# Altium PCB VCO PCB.PcbDoc
Units mm, origin at the board's own origin, x right, y up, seen from the top; angles counter-clockwise.
Board outline 129.54 x 57.15 mm, 2 copper layers (Top Layer, Bottom Layer); 75 components, 45 nets, 208 pads, 43 vias.
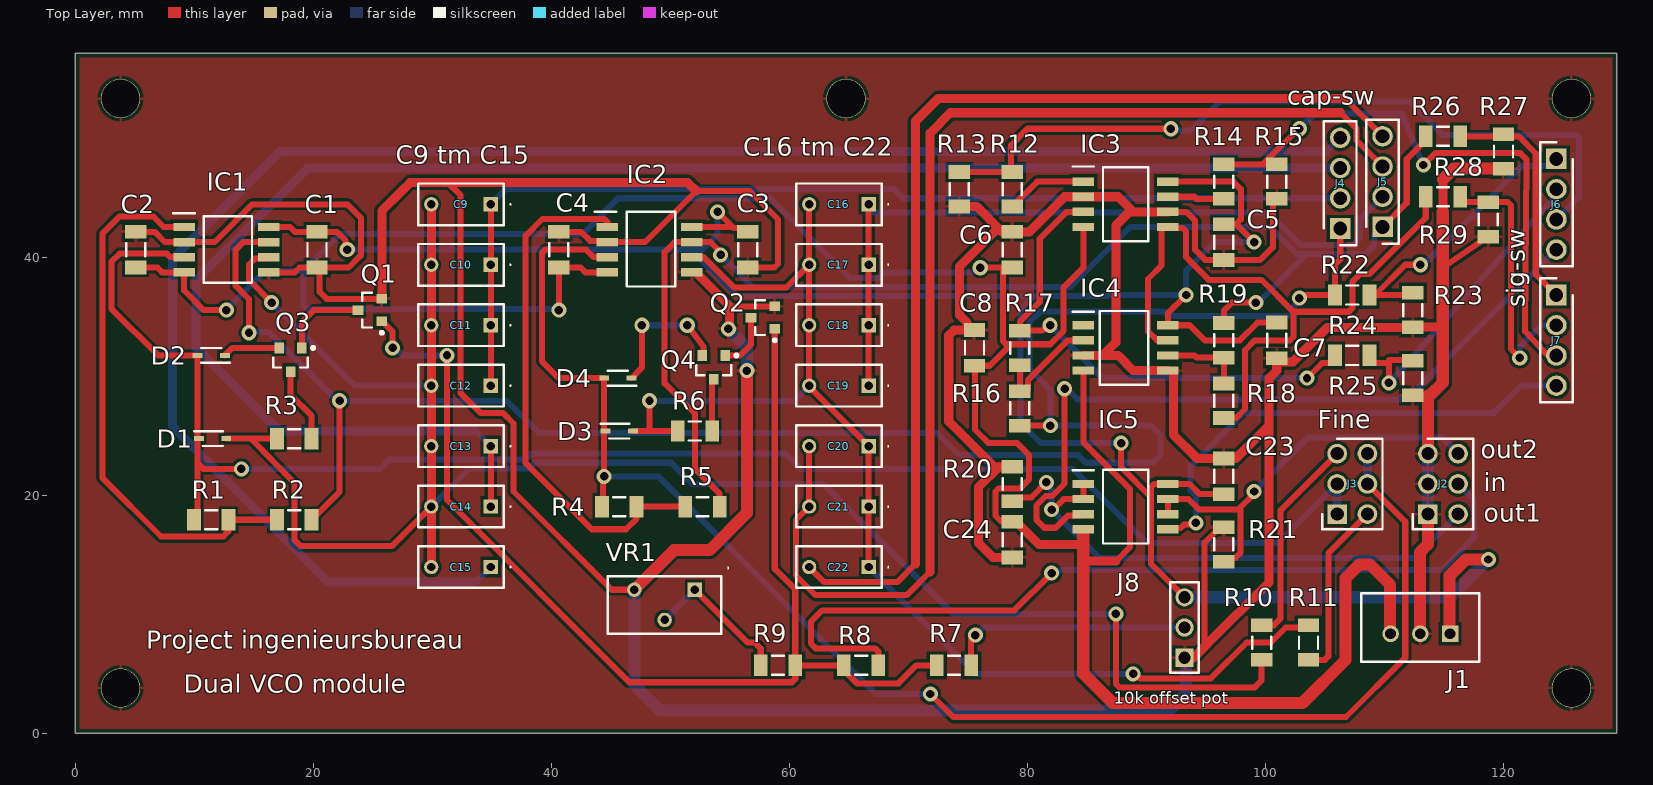
[diagram p0: Top Layer view]
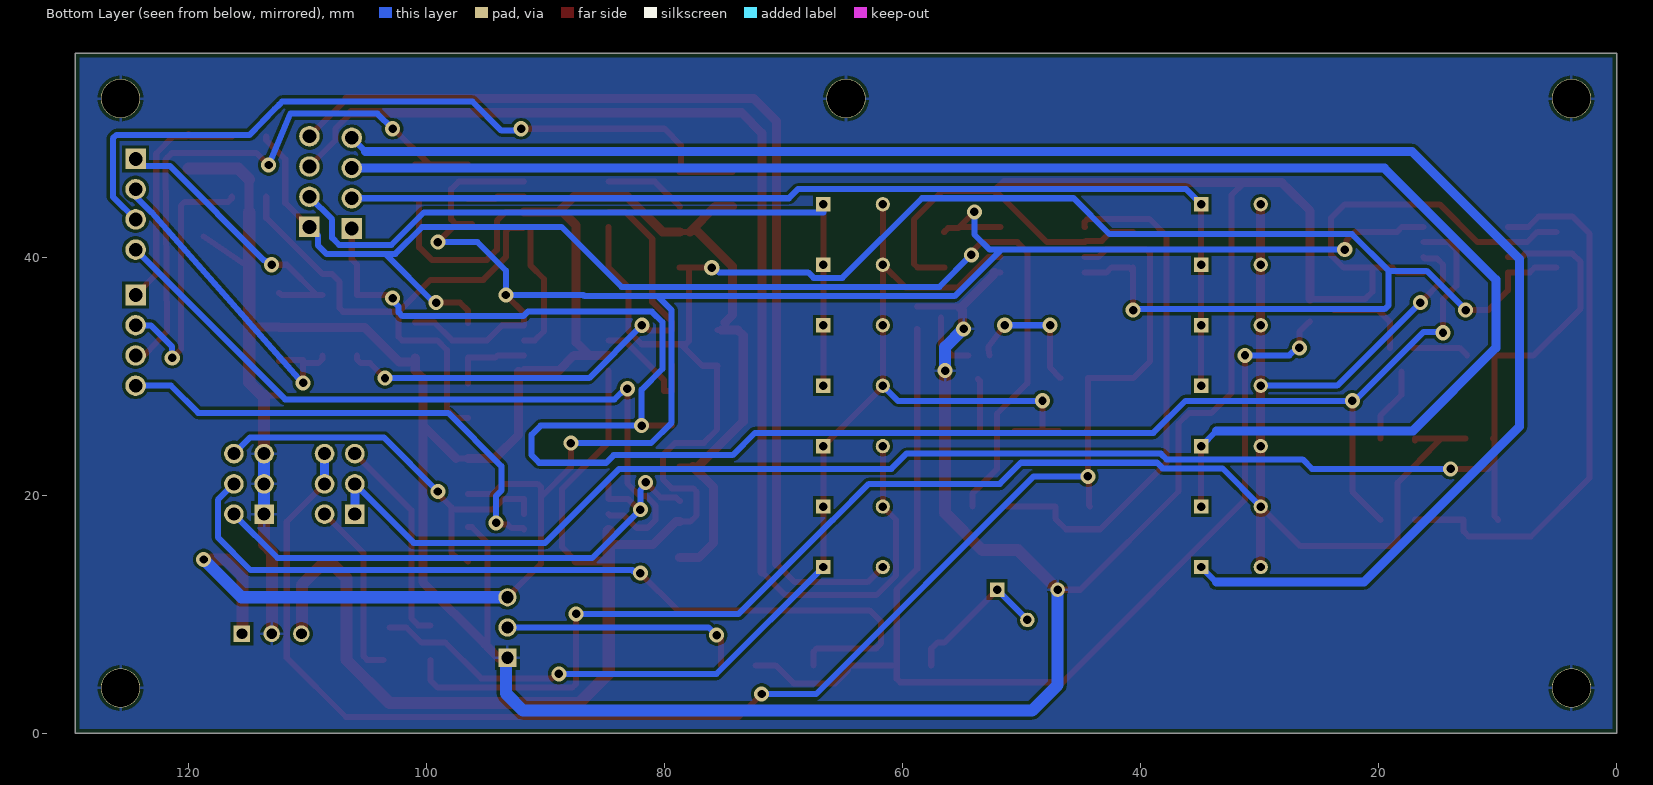
[diagram p1: Bottom Layer view, seen from below]

## Layer stack, top to bottom
Top Solder: solder mask 0.0102, Solder Resist, Dk 3.5
Top Layer: signal copper 0.0356
Dielectric 1: dielectric 0.32, FR-4, Dk 4.8
Bottom Layer: signal copper 0.0356
Bottom Solder: solder mask 0.0102, Solder Resist, Dk 3.5

## Board outline
0,0 129.54,0 129.54,57.15 0,57.15

## Design rules (kind name [scope] priority, off if disabled: settings)
Clearance [All] p1: gap=0.254 ignorepadtopadclearanceinfootprint=FALSE except(0.152: Fill-Fill Fill-Poly Fill-Region Poly-Poly Poly-Region Region-Region)
DiffPairsRouting [All] p1: maxlimit=0.254 minlimit=0.254 mostfreqgap=0.254 toplayer_minwidth=0.381 toplayer_maxwidth=1.27 toplayer_prefwidth=0.508 bottomlayer_minwidth=0.381 bottomlayer_maxwidth=1.27 bottomlayer_prefwidth=0.508 maxuncoupledlength=12.7
HoleSize [All] p1: absolutevalues=TRUE maxlimit=5.588 minlimit=0.508 maxpercent=80.000 minpercent=20.000
PolygonConnect [All] p1: connectstyle=Relief reliefconductorwidth=0.254 reliefentries=4 polygonreliefangle="90 Angle" airgapwidth=0.254
RoutingVias [All] p1: holewidth=0.711 width=1.27 viastyle="Through Hole" minholewidth=0.711 minwidth=1.27 maxholewidth=0.711 maxwidth=1.27
SolderMaskExpansion [All] p1: expansion=0.102 istentingtop=FALSE
SupplyNets "Schematic Supply Nets_22" [InNet('pot2out')] p1: voltage=0.000
SupplyNets "Schematic Supply Nets_5" [InNet('saw2')] p2: voltage=0.000
SupplyNets "Schematic Supply Nets_23" [InNet('saw1')] p3: voltage=0.000
SupplyNets "Schematic Supply Nets_21" [InNet('sigcom2')] p4: voltage=0.000
SupplyNets "Schematic Supply Nets_20" [InNet('pot1out')] p5: voltage=0.000
SupplyNets "Schematic Supply Nets_19" [InNet('pot1in')] p6: voltage=0.000
SupplyNets "Schematic Supply Nets_18" [InNet('GND')] p7: voltage=0.000
SupplyNets "Schematic Supply Nets_17" [InNet('V2+1')] p8: voltage=0.000
SupplyNets "Schematic Supply Nets_16" [InNet('output 1')] p9: voltage=0.000
SupplyNets "Schematic Supply Nets_15" [InNet('invsaw1')] p10: voltage=0.000
SupplyNets "Schematic Supply Nets_14" [InNet('output 2')] p11: voltage=0.000
SupplyNets "Schematic Supply Nets_13" [InNet('pot2in')] p12: voltage=0.000
SupplyNets "Schematic Supply Nets_12" [InNet('sqr2')] p13: voltage=0.000
SupplyNets "Schematic Supply Nets_11" [InNet('V1+1')] p14: voltage=0.000
SupplyNets "Schematic Supply Nets_10" [InNet('V1-0')] p15: voltage=0.000
SupplyNets "Schematic Supply Nets_9" [InNet('sqr1')] p16: voltage=0.000
SupplyNets "Schematic Supply Nets_8" [InNet('sigcom1')] p17: voltage=0.000
SupplyNets "Schematic Supply Nets_7" [InNet('+12')] p18: voltage=0.000
SupplyNets "Schematic Supply Nets_6" [InNet('input')] p19: voltage=0.000
SupplyNets "Schematic Supply Nets_4" [InNet('V2-0')] p20: voltage=0.000
SupplyNets "Schematic Supply Nets_3" [InNet('V2-1')] p21: voltage=0.000
SupplyNets "Schematic Supply Nets_2" [InNet('V1-1')] p22: voltage=0.000
SupplyNets "Schematic Supply Nets_1" [InNet('invsaw2')] p23: voltage=0.000
SupplyNets "Schematic Supply Nets" [InNet('-12')] p24: voltage=0.000
Width [All] p1: maxlimit=1.27 minlimit=0.203 preferedwidth=0.508 minimp=50.000000 maximp=50.000000 favimp=50.000000
28 further rules are at their usual default settings.

## Components (designator, comment, footprint, x,y, rotation, side; value= is the part's Value field where it differs from the comment)
C1 "100nF" C1206 20.32,40.64 r270 top value=10nF
C2 "100nF" C1206 5.08,40.64 r270 top
C3 "100nF" C1206 56.515,40.64 r270 top value=10nF
C4 "100nF" C1206 40.64,40.64 r270 top
C5 "100nF" C1206 96.52,41.275 r270 top
C6 "100nF" C1206 78.74,40.64 r270 top
C7 "100nF" C1206 100.965,33.02 r270 top
C8 "100nF" C1206 75.565,32.385 r270 top
C9 "10nF" R82MC2100DQ50J 34.925,44.45 r180 top
C10 "10nF" R82MC2100DQ50J 34.925,39.37 r180 top
C11 "10nF" R82MC2100DQ50J 34.925,34.29 r180 top
C12 "10nF" R82MC2100DQ50J 34.925,29.21 r180 top
C13 "10nF" R82MC2100DQ50J 34.925,24.13 r180 top
C14 "10nF" R82MC2100DQ50J 34.925,19.05 r180 top
C15 "10nF" R82MC2100DQ50J 34.925,13.97 r180 top
C16 "10nF" R82MC2100DQ50J 66.675,44.45 r180 top
C17 "10nF" R82MC2100DQ50J 66.675,39.37 r180 top
C18 "10nF" R82MC2100DQ50J 66.675,34.29 r180 top
C19 "10nF" R82MC2100DQ50J 66.675,29.21 r180 top
C20 "10nF" R82MC2100DQ50J 66.675,24.13 r180 top
C21 "10nF" R82MC2100DQ50J 66.675,19.05 r180 top
C22 "10nF" R82MC2100DQ50J 66.675,13.97 r180 top
C23 "100nF" C1206 96.52,21.59 r90 top
C24 "100nF" C1206 78.74,16.28 r90 top
D1 "1N4148WS" SODFL2512X90N 11.55,24.765 r0 top
D2 "1N4148WS" SODFL2512X90N 11.43,31.75 r180 top
D3 "1N4148WS" SODFL2512X90N 45.72,25.4 r0 top
D4 "1N4148WS" SODFL2512X90N 45.6,29.845 r180 top
IC1 "NE5532PSR" SOIC127P780X200-8N 12.7,40.64 r0 top
IC2 "NE5532PSR" SOIC127P780X200-8N 48.26,40.64 r0 top
IC3 "NE5532PSR" SOIC127P780X200-8N 88.265,44.45 r0 top
IC4 "NE5532PSR" SOIC127P780X200-8N 88.265,32.385 r0 top
IC5 "NE5532PSR" SOIC127P780X200-8N 88.265,19.05 r0 top
J1 "B3B-XH-A(LF)(SN)" FP-B3B-XH-A_LF_SN-MFG 113.03,8.89 r180 top
J2 "TSW-102-07-G-T" HDRV6W64P254_3X2_508X762X838P 113.665,18.415 r0 top
J3 "TSW-102-07-G-T" HDRV6W64P254_3X2_508X762X838P 106.045,18.415 r0 top
J4 "22-28-4042" HDRV4W66P0X254_1X4_1016X249X1003P 106.299,42.418 r90 top
J5 "22-28-4042" HDRV4W66P0X254_1X4_1016X249X1003P 109.855,42.545 r90 top
J6 "22-28-4042" HDRV4W66P0X254_1X4_1016X249X1003P 124.46,48.26 r270 top
J7 "22-28-4042" HDRV4W66P0X254_1X4_1016X249X1003P 124.46,36.83 r270 top
J8 "68001-103HLF" 68001103HLF 93.218,6.35 r90 top
Q1 "BC847BW" SOT23 24.765,35.56 r180 top
Q2 "BC847BW" SOT23 57.785,34.925 r180 top
Q3 "BC857BW" SOT23 18.095,31.385 r270 top
Q4 "BC857BW" SOT23 53.66,30.75 r270 top
R1 "100K" R1206 11.43,17.945 r180 top
R2 "33K" R1206 18.415,17.945 r0 top value=1K
R3 "4.7K" R1206 18.415,24.765 r180 top value=1K
R4 "100K" R1206 45.72,19.05 r180 top
R5 "33K" R1206 52.705,19.05 r0 top value=1K
R6 "4.7K" R1206 52.07,25.4 r180 top value=1K
R7 "100K" R1206 73.84,5.715 r180 top value=1K
R8 "100K" R1206 66.04,5.715 r0 top value=1K
R9 "3.9K" R1206 59.055,5.715 r0 top value=1K
R10 "200k" R1206 99.695,7.62 r90 top value=1K
R11 "200k" R1206 103.632,7.62 r90 top value=1K
R12 "3.9k" R1206 78.74,45.72 r270 top value=1K
R13 "1K" R1206 74.295,45.72 r90 top
R14 "3.9k" R1206 96.52,46.355 r90 top value=1K
R15 "1K" R1206 100.965,46.355 r90 top
R16 "10k" R1206 79.375,27.305 r90 top value=1K
R17 "10k" R1206 79.375,32.385 r270 top value=1K
R18 "10k" R1206 96.52,27.94 r90 top value=1K
R19 "10k" R1206 96.52,33.02 r90 top value=1K
R20 "10k" R1206 78.74,20.955 r90 top value=1K
R21 "10k" R1206 96.52,15.875 r90 top value=1K
R22 "3.3k" R1206 107.315,36.83 r0 top value=1K
R23 "3.9k" R1206 112.395,35.56 r90 top value=1K
R24 "3.3k" R1206 107.315,31.75 r0 top value=1K
R25 "3.9k" R1206 112.395,29.845 r90 top value=1K
R26 "3.3k" R1206 114.935,50.165 r0 top value=1K
R27 "3.9k" R1206 120.015,48.895 r90 top value=1K
R28 "3.3k" R1206 114.935,45.085 r0 top value=1K
R29 "3.9k" R1206 118.745,43.18 r90 top value=1K
VR1 "3296Y-1-102" 3296Y1102 52.07,12.065 r90 top

## Footprints (in the part's own frame and the unit in brackets; to place one, negate y for a bottom-side part, rotate by r counter-clockwise, add the part's x,y. Pads: shape width x height; smd on the part's side, far side on the other; paste and mask are expansions set on the pad)
3296Y1102 [mm]
  rect 1.217x1.217 hole 0.71: 1(0,0)
  round 1.217 hole 0.71: 2(-2.54,2.54) 3(0,5.08)
  silkscreen extent -3.69,-2.84 1.88,7.3, body extent -3.69,-2.22 1.14,7.3, height 11.9
68001103HLF [mm]
  rect 1.53x1.53 hole 1.02: 1(0,0)
  round 1.53 hole 1.02: 2(2.54,0) 3(5.08,0)
  silkscreen extent -1.27,-1.2 6.35,1.2, body extent -1.27,-1.2 6.35,1.2, height 8.68
C1206 [mm] "Chip Capacitor, Body 3.2x1.6mm, Height 1.7mm, IPC Medium Density"
  rect 1.15x1.8 smd: 1(-1.5,0) 2(1.5,0)
  silkscreen extent -0.55,-0.8 0.55,0.8, body extent -1.7,-0.9 1.7,0.9, height 1.7
FP-B3B-XH-A_LF_SN-MFG [mm]
  rect 1.4x1.4 hole 0.9 paste-2539.97 mask+0: 1(-2.5,0.525)
  round 1.4 hole 0.9 paste-2539.97 mask+0: 2(0,0.525) 3(2.5,0.525)
  silkscreen extent -4.95,-2.88 4.95,2.88, body extent -5.05,-2.98 5.05,2.98, height 0.25
HDRV4W66P0X254_1X4_1016X249X1003P [mm]
  rect 1.725x1.725 hole 1.15: 1(0,0)
  round 1.725 hole 1.15: 2(2.54,0) 3(5.08,0) 4(7.62,0)
  silkscreen extent -1.4,-1.37 9.02,1.37, body extent -1.27,-1.24 8.89,1.24, height 9.78
HDRV6W64P254_3X2_508X762X838P [mm]
  rect 1.65x1.65 hole 1.1: 1(0,0)
  round 1.65 hole 1.1: 2(0,2.54) 3(0,5.08) 4(2.54,0) 5(2.54,2.54) 6(2.54,5.08)
  silkscreen extent -1.27,-1.27 3.81,6.35, body extent -1.27,-1.27 3.81,6.35, height 8.38
R82MC2100DQ50J [mm]
  rect 1.2x1.2 hole 0.7: 1(0,0)
  round 1.2 hole 0.7: 2(5,0)
  silkscreen extent -1.7,-1.75 6.1,1.75, body extent -1.2,-1.81 6.2,1.8, height 8.48
R1206 [mm] "Chip Resistor, Body 3.2x1.6mm, IPC Medium Density"
  rect 1.15x1.8 smd: 1(-1.45,0) 2(1.45,0)
  silkscreen extent -0.5,-0.8 0.5,0.8, body extent -1.67,-0.87 1.67,0.87, height 0.75
SODFL2512X90N [mm]
  rect 0.82x0.42 smd: 1(-1.15,0) 2(1.15,0)
  silkscreen extent -1.56,-0.62 0.85,0.62, body extent -1.25,-0.63 1.25,0.63, height 0.9
SOIC127P780X200-8N [mm]
  rect 1.8x0.7 smd: 1(-3.55,1.905) 2(-3.55,0.635) 3(-3.55,-0.635) 4(-3.55,-1.905) 5(3.55,-1.905) 6(3.55,-0.635) 7(3.55,0.635) 8(3.55,1.905)
  silkscreen extent -4.44,-2.79 2.16,3.05, body extent -4.1,-4.64 4.1,4.64, height 4.21
SOT23 [mm] "SOT23, 3-Leads, Body 2.92x1.3mm, Pitch 0.95mm"
  rect 0.9x0.8 smd: 1(-1,0.95) 2(-1,-0.95) 3(1,0)
  silkscreen extent -1.13,-1.46 0.65,2.02, body extent -0.65,-1.46 0.65,1.46, height 1.11

## Part data
C1 C2 C3 C4 C5 C6 C7 C8 C23 C24: library part Capacitor_1206, "SMD Capacitor 1206", LatestRevisionDate=03-11-2016, LatestRevisionNote=Creation, PackageDescription="Chip Capacitor, Body 3.2x1.6mm, Height 1.7mm, IPC Medium Density", PackageReference=C1206, Published=03-11-2016, Publisher=Windesheim
C9 C10 C11 C12 C13 C14 C15 C16 C17 C18 C19 C20 C21 C22: library part R82MC2100DQ50J, "folie condensator", Manufacturer_Name=KEMET, Mouser Part Number=80-R82MC2100DQ50J, Datasheet Link=https://search.kemet.com/component-documentation/download/specsheet/R82MC2100DQ50J, Height=7.6mm, Manufacturer_Part_Number=R82MC2100DQ50J, Mouser Price/Stock=https://www.mouser.co.uk/ProductDetail/KEMET/R82MC2100DQ50J?qs=Jv4FAWB%252B0HbaB%2FcNVoyM2A%3D%3D
D1 D2 D3 D4: "Diode", Manufacturer_Name=onsemi, Mouser Part Number=512-1N4148WS, Arrow Part Number=1N4148WS, Arrow Price/Stock=https://www.arrow.com/en/products/1n4148ws/on-semiconductor?region=europe, Height=0.9mm, Manufacturer_Part_Number=1N4148WS, Mouser Price/Stock=https://www.mouser.co.uk/ProductDetail/onsemi-Fairchild/1N4148WS?qs=2%2FYqgE%252BHg%252BKBrKZlAsMLhw%3D%3D
IC1 IC2 IC3 IC4 IC5: "Integrated Circuit", Manufacturer_Name="Texas Instruments", Mouser Part Number=595-NE5532PSR, Arrow Part Number=NE5532PSR, Arrow Price/Stock=https://www.arrow.com/en/products/ne5532psr/texas-instruments?utm_currency=USD&region=nac, Datasheet Link=http://www.ti.com/lit/gpn/ne5532, Height=2mm, Manufacturer_Part_Number=NE5532PSR, Mouser Price/Stock=https://www.mouser.co.uk/ProductDetail/Texas-Instruments/NE5532PSR?qs=bkMXpVdiF42odhJUqZo0sQ%3D%3D
J1: library part CMP-17439-000014-3, "CONN HEADER VERT 3POS 2.5MM", Color=Natural, Contact Resistance=20mR, Current Rating=3A, Flammability Rating="UL94 V-0", Housing Color=White, Insulation Resistance=1GR, Max Operating Temperature=85°C, Max Voltage Rating (AC)=250V, Min Operating Temperature=-25°C, Connector Type=Header, Contact Finish - Mating=TIN, Contact Material=Brass, Contact Plating=Tin, Contact Shape=Square, Contact Type="Male Pin", Depth=5.75mm, Fastening Type=Detent, Gender=Male, Housing Material=Polyamide, Insulation Color=Natural, Insulation Material=Nylon, Lead Free="Lead Free", Lead Pitch=2.5mm, Length=9.9mm, Max Current Rating=3A, Max Voltage Rating (DC)=250V, Mount="Through Hole", Number of Contacts=3, Number of Positions=3, Number of Rows=1, Orientation=Straight, Packaging=Bulk, Pitch=2.5mm, REACH SVHC="No SVHC", Series=XH, Termination=Solder, Voltage Rating=250V, Voltage Rating (AC)=250V, Wire/Cable Gauge=22AWG
J2 J3: "Connector", Manufacturer_Name=SAMTEC, Mouser Part Number=200-TSW10207GT, Arrow Part Number=TSW-102-07-G-T, Arrow Price/Stock=https://www.arrow.com/en/products/tsw-102-07-g-t/samtec?region=nac, Datasheet Link=http://suddendocs.samtec.com/catalog_english/tsw_th.pdf, Height=8.38mm, Manufacturer_Part_Number=TSW-102-07-G-T, Mouser Price/Stock=https://www.mouser.co.uk/ProductDetail/Samtec/TSW-102-07-G-T?qs=rU5fayqh%252BE0IRH%2FB9eWD2w%3D%3D
J4 J5 J6 J7: "Connector", Manufacturer_Name=Molex, Mouser Part Number=538-22-28-4042, Datasheet Link=https://www.molex.com/content/dam/molex/molex-dot-com/products/automated/en-us/salesdrawingpdf/423/42375/022284042_sd.pdf?inline, Height=10.03mm, Manufacturer_Part_Number=22-28-4042, Mouser Price/Stock=https://www.mouser.co.uk/ProductDetail/Molex/22-28-4042?qs=GAPJcf4kvdu6DqYOOlzdaQ%3D%3D
J8: "Connector", Manufacturer_Name=Amphenol, Datasheet Link=https://cdn.amphenol-cs.com/media/wysiwyg/files/drawing/68000.pdf, Height=8.58mm, Manufacturer_Part_Number=68001-103HLF
R1 R2 R3 R4 R5 R6 R7 R8 R9 R10 R11 R12 R13 R14 R15 R16 R17 R18 R19 R20 R21 R22 R23 R24 R25 R26 R27 R28 R29: library part Resistor_1206, "SMD Resistor 1206", LatestRevisionDate=03-11-2016, LatestRevisionNote=Creation, PackageDescription="Chip Resistor, Body 3.2x1.6mm, IPC Medium Density", PackageReference=R1206, Published=03-11-2016, Publisher=Windesheim
VR1: "Variable Resistor", Manufacturer_Name=Bourns, Mouser Part Number=652-3296Y-1-102, Arrow Part Number=3296Y-1-102, Arrow Price/Stock=https://www.arrow.com/en/products/3296y-1-102/bourns?region=nac, Datasheet Link=https://www.bourns.com/data/global/pdfs/3296.pdf, Height=11.8mm, Manufacturer_Part_Number=3296Y-1-102, Mouser Price/Stock=https://www.mouser.co.uk/ProductDetail/Bourns/3296Y-1-102?qs=DRqqlFaNjzXVgSOsMqUlIA%3D%3D

## Free pads (board coordinates)
  round 3.3 hole 3.2: 39(3.81,3.81) 39(3.81,53.34) 39(64.77,53.34) 39(125.73,3.81) 39(125.73,53.34)

## Via types
v1: diameter 1.27, hole 0.711, Top Layer to Bottom Layer, 43 vias

## Nets (pads, with @x,y where several pads share a name; then routed paths per layer and width w, separated by ;. In a path a pad name is that pad's centre, name@x,y a point inside that pad or via, vN(x,y) a via of type N, cw(c..) or ccw(c..) an arc to the next point about the centre after c; other vN are vias at no path point)
+12: C1.1 C3.1 C5.1 C7.1 C23.1 IC1.8 IC2.8 IC3.8 IC4.8 IC5.8 J1.1 J8.3 | length 204.4
  Top Layer w0.508: IC1.8 18.059,42.545 18.464,42.14 C1.1 21.995,42.14 22.714,41.421 22.714,40.786 v1(22.86,40.64) ; IC2.8 55.245,42.545 ; v1(53.975,43.815) 55.245,42.545 ; C3.1 56.194,42.461 55.329,42.461 55.245,42.545 ; v1(87.884,24.384) 87.884,22.352 90.399,19.837 ; IC3.8 97.307,46.355 97.942,45.72 97.942,43.18 97.537,42.775 ; J8.3 90.399,14.249 90.399,19.837 ; v1(93.345,36.83) 91.815,35.3 IC4.8 93.65,34.29 94.92,33.02 97.865,33.02 99.365,34.52 C7.1 ; C5.1@96.195,42.775 C5.1 97.537,42.775 ; C23.1 94.499,20.09 93.634,20.955 IC5.8 90.678,20.955 90.399,20.676 90.399,19.837 ; v1(99.06,41.275) 97.56,42.775 97.537,42.775
  Top Layer w1.016: J1.1@115.49,8.89 115.49,13.255 116.84,14.605 v1(118.745,14.605)
  Bottom Layer w0.508: v1(22.86,40.64) 51.74,40.64 ; v1(53.975,43.815) 53.975,41.91 52.705,40.64 51.74,40.64 ; v1(87.884,24.384) 81.153,24.384 79.426,26.111 79.426,35.56 80.604,36.738 ; v1(99.06,41.275) 95.733,41.275 93.345,38.887 v1(93.345,36.83) 86.844,36.83 86.752,36.738 80.604,36.738 ; 51.74,40.64 55.642,36.738 80.604,36.738
  Bottom Layer w1.016: J8.3 115.57,11.43 v1(118.745,14.605)
-12: C2.2 C4.2 C6.2 C8.2 C24.2 IC1.4 IC2.4 IC3.4 IC4.4 IC5.4 J1.3 | length 239.4
  Top Layer w0.508: C2.2 6.909,39.14 7.314,38.735 IC1.4 9.15,37.205 10.795,35.56 v1(12.7,35.56) ; v1(40.64,35.56) C4.2 ; C4.2@40.805,38.975 40.97,39.14 42.469,39.14 42.874,38.735 IC2.4 ; C8.2 C8.2@75.59,30.885 ; v1(76.046,39.116) 76.07,39.14 C6.2@77.953,39.14 ; C24.2 77.84,17.78 77.332,18.288 77.332,20.32 77.6,20.588 79.414,20.588 80.162,21.336 80.162,23.368 79.121,24.409 76.708,24.409 75.59,25.527 C8.2@75.59,30.885 ; C6.2 C6.2@77.953,39.14 ; IC4.4 84.709,30.48 84.709,24.449 88.646,20.512 88.646,15.659 87.465,14.478 ; IC3.4 84.715,39.122 83.058,37.465 83.058,33.807 81.94,32.69 78.64,32.69 ; C8.2@75.59,30.885 76.835,30.885 78.64,32.69 ; C6.2@77.953,39.14 77.953,32.969 78.232,32.69 78.64,32.69
  Top Layer w0.762: C24.2 79.065,17.78 80.97,15.875 84.455,15.875 ; 84.836,14.478 87.465,14.478
  Top Layer w1.016: IC5.4@84.709,16.987 84.709,15.875 84.709,14.478 84.709,5.018 87.187,2.54 103.124,2.54 106.756,6.172 106.756,13.03 107.925,14.199 108.766,14.199 110.49,12.475 J1.3@110.49,8.89
  Bottom Layer w0.508: v1(12.7,35.56) 12.7,35.577 15.985,38.862 19.177,38.862 ; v1(40.64,35.56) 40.564,35.636 19.507,35.636 19.177,35.966 19.177,38.862 ; v1(76.046,39.116) 75.84,39.116 75.459,38.735 67.958,38.735 67.485,38.262 65.082,38.262 58.386,44.958 45.644,44.958 42.626,41.94 22.255,41.94 19.177,38.862
GND: C1.2 C2.1 C3.2 C4.1 C5.2 C6.1 C7.2 C8.1 C23.2 C24.1 IC1.2 IC1.5 IC2.2 IC2.5 IC3.2 IC3.6 IC4.3 IC4.5 J1.2 J2.1 J2.2 J2.3 J8.1 pad.39 Q1.2 Q2.2 R13.1 R15.1 R20.2 R21.2 R23.1 R25.1 R27.1 R29.1 VR1.3 | length 457.6
  Top Layer w0.508: C2.1 6.68,42.14 7.545,41.275 IC1.2 11.709,41.275 14.884,44.45 22.86,44.45 24.003,43.307 24.003,40.167 22.976,39.14 C1.2@20.549,39.14 ; IC1.5 18.442,38.735 18.847,39.14 C1.2 C1.2@20.549,39.14 ; Q1.2 21.123,36.51 20.549,37.084 C1.2@20.549,39.14 ; 31.318,46.279 32.385,45.212 32.385,28.588 34.071,26.903 35.962,26.903 36.83,26.035 36.83,20.32 45.085,12.065 VR1.3 ; C4.1 42.504,42.14 43.273,41.371 44.614,41.371 IC2.2 47.879,41.275 52.172,45.568 56.667,45.568 59.055,43.18 59.055,39.438 58.757,39.14 C3.2 ; IC2.5 IC2.5@52.172,38.735 ; 55.181,35.875 Q2.2 ; 74.919,34.531 74.919,34.206 75.24,33.885 C8.1 ; 77.216,22.405 77.625,22.405 R20.2 ; 77.216,42.14 77.875,42.14 C6.1 ; 88.576,43.796 88.868,43.796 ; IC4.5@91.796,30.48 IC4.5 92.182,30.48 IC4.5@92.278,30.384 ; IC3.6 93.345,43.815 94.107,43.053 94.107,40.616 94.948,39.775 C5.2 99.568,39.775 100.635,40.842 100.635,44.905 R15.1 ; J8.1 J8.1@93.98,6.35 ; 95.098,7.468 94.894,7.264 94.894,16.024 96.195,17.325 R21.2 ; C23.2 97.536,23.09 ; R25.1 113.665,28.395 113.841,28.395 ; R23.1 R23.1@112.433,34.148 ; 114.91,43.79 114.935,43.815 ; 115.041,39.214 R29.1
  Top Layer w0.762: Q1.2 25.765,43.891 27.441,45.568 28.153,46.279 31.318,46.279 51.46,46.279 52.172,45.568 ; IC2.5@52.298,38.735 52.329,38.704 52.329,38.578 55.181,35.725 54.987,35.53 54.987,34.082 v1(54.889,33.985) ; R13.1 75.745,44.27 C6.1@77.875,42.14 ; 74.919,34.531 74.295,35.155 74.295,39.219 77.216,42.14 ; C8.1@75.24,33.885 73.852,33.885 73.406,33.439 73.406,26.215 77.216,22.405 ; 77.625,22.405 75.921,20.701 75.921,15.977 77.117,14.78 C24.1 ; C6.1 80.189,42.14 83.134,45.085 IC3.2 87.63,45.085 88.9,43.815 IC3.6 ; IC4.3 86.36,31.75 ; 88.541,43.76 87.452,42.672 87.452,32.842 86.36,31.75 ; IC4.5@91.796,30.48 88.9,30.48 87.63,31.75 86.36,31.75 ; IC4.5@92.278,30.384 92.278,25.095 94.283,23.09 C23.2 ; J8.1@93.98,6.35 94.894,7.264 ; 95.098,7.468 100.33,12.7 100.33,25.884 ; 97.536,23.09 100.33,25.884 ; C7.2 100.965,31.209 100.965,30.48 100.33,29.845 100.33,25.884 ; C7.2@101.276,31.209 102.329,31.209 105.23,34.11 R23.1 ; R23.1@112.433,34.148 114.656,34.148 ; 114.935,43.815 114.935,46.556
  Top Layer w1.016: VR1.3 50.317,15.392 53.315,15.392 56.439,18.517 v1(56.439,30.48) ; J1.2@112.99,8.89 112.99,15.2 113.665,15.875 J2.1 ; J2.3 113.665,28.395 ; 113.841,28.395 114.91,29.464 114.91,43.79 ; 114.935,46.556 115.824,47.445 R27.1
  Bottom Layer w1.016: VR1.3 46.99,4.064 49.149,1.905 91.912,1.905 93.345,3.338 J8.1@93.345,5.715 ; v1(54.889,33.985) 56.439,32.436 v1(56.439,30.48) ; J2.1 J2.2 J2.3
input: J2.5 R8.2 | length 72.6
  Top Layer w0.508: R8.2 67.49,6.858 67.211,7.137 62.23,7.137 61.824,7.544 61.824,9.38 62.782,10.338 78.918,10.338 v1(82.042,13.462)
  Bottom Layer w0.508: v1(82.042,13.462) 82.188,13.608 82.612,13.608 82.721,13.716 114.808,13.716 117.551,16.459 117.551,19.609 J2.5
invsaw1: IC3.3 R17.1 R24.1 | length 42.5
  Top Layer w0.508: v1(81.915,34.29) 81.709,34.29 81.254,33.835 R17.1 79.375,34.569 81.051,36.246 81.051,41.554 83.312,43.815 IC3.3 ; v1(103.505,29.845) 104.764,31.104 105.544,31.104 105.865,31.425 R24.1
  Bottom Layer w0.508: v1(81.915,34.29) 86.36,29.845 v1(103.505,29.845)
invsaw2: IC3.5 IC4.7 R18.1 R28.1 | length 57.7
  Top Layer w0.508: IC4.7 90.907,33.02 90.145,33.782 90.145,38.176 91.262,39.294 91.262,42.545 IC3.5 91.894,42.466 93.047,42.466 93.345,42.168 93.345,40.005 95.25,38.1 99.684,38.1 102.362,35.422 ; R18.1 97.536,26.49 98.298,27.252 98.298,32.192 99.126,33.02 102.075,33.02 102.373,33.318 102.373,35.411 102.362,35.422 ; R28.1 113.485,43.316 108.777,38.608 107.975,38.608 107.315,37.948 107.315,35.72 107.017,35.422 102.362,35.422
NetD2_1: D2.1 Q3.2 | length 4.8
  Top Layer w0.508: D2.1 13.215,32.385 Q3.2
NetD4_1: D4.1 Q4.2 | length 11.6
  Top Layer w0.508: D4.1 47.625,30.72 v1(47.625,34.29) ; v1(51.435,34.29) 52.786,32.481 52.786,32.276 52.738,31.946 Q4.2
  Bottom Layer w0.508: v1(47.625,34.29) v1(51.435,34.29)
NetIC1_1: IC1.1 R1.1 R2.1 | length 46.2
  Top Layer w0.508: IC1.1 7.442,42.545 6.579,43.409 3.708,43.409 2.286,41.986 2.286,21.463 7.214,16.535 12.446,16.535 12.88,16.969 R1.1 R2.1
NetIC2_1: IC2.1 R4.1 R5.1 | length 44.2
  Top Layer w0.508: IC2.1 44.729,42.545 44.729,42.951 44.45,43.231 39.268,43.231 37.846,41.808 37.846,22.708 43.409,17.145 46.281,17.145 47.17,18.034 R4.1 R5.1
NetIC3_1: IC3.1 R12.2 | length 6.8
  Top Layer w0.508: R12.2 80.825,46.355 IC3.1
NetIC3_7: IC3.7 R14.1 | length 4.8
  Top Layer w0.508: IC3.7 94.056,45.085 94.236,44.905 R14.1
NetIC4_2: IC4.2 R16.2 R17.2 | length 9.8
  Top Layer w0.508: R17.2 R16.2 80.058,28.755 80.058,29.681 83.398,33.02 IC4.2
NetIC4_6: IC4.6 R18.2 R19.1 | length 7
  Top Layer w0.508: IC4.6 94.056,31.75 94.236,31.57 R19.1 R18.2
NetJ3_3: J3.3 R10.2 | length 17.7
  Top Layer w0.508: R10.2 100.713,9.07 101.295,9.652 101.295,18.745 J3.3
NetJ3_4: J3.4 R11.1 | length 15.1
  Top Layer w0.508: R11.1 105.011,6.17 105.308,6.468 105.308,15.138 J3.4
NetJ6_1: J6.1 R22.2 R23.2 | length 24.2
  Top Layer w0.508: R22.2 R22.2@109.22,36.83 ; R23.2 112.215,36.83 R22.2@109.22,36.83 ; v1(113.03,39.37) 111.76,39.37 R22.2@109.22,36.83
  Bottom Layer w0.508: v1(113.03,39.37) 113.236,39.37 113.589,39.723 113.637,39.723 121.565,47.651 123.851,47.651 124.458,48.258 J6.1@124.458,48.766
NetJ6_2: J6.2 R24.2 R25.2 | length 27.7
  Top Layer w0.508: R24.2 108.765,31.436 109.086,31.115 110.388,31.115 ; v1(110.388,29.439) 110.388,31.115 ; R25.2 112.328,31.362 110.388,31.362 110.388,31.115
  Bottom Layer w0.508: v1(110.388,29.439) 110.741,29.791 123.1,43.758 ; 123.1,43.759 124.475,45.133 124.475,45.479 J6.2
NetJ7_1: J7.1 R26.2 R27.2 | length 19.7
  Top Layer w0.508: R26.2 119.835,50.165 R27.2 120.195,50.165 121.285,50.165 122.729,48.721 122.729,38.561 J7.1
NetJ7_2: J7.2 R28.2 R29.2 | length 22.3
  Top Layer w0.508: R28.2 116.385,44.951 116.706,44.63 R29.2@118.413,44.63 ; R29.2@118.647,44.628 119.391,44.641 119.391,44.661 120.352,44.661 120.65,44.364 120.65,32.283 v1(121.387,31.547)
  Bottom Layer w0.508: v1(121.387,31.547) 121.397,31.557 121.397,32.497 123.184,34.284 124.454,34.284 J7.2
NetJ8_2: J8.2 R7.1 | length 20.6
  Top Layer w0.508: R7.1 75.29,7.904 v1(75.641,8.255)
  Bottom Layer w0.508: v1(75.641,8.255) 75.685,8.255 76.32,8.89 J8.2@93.256,8.89
NetQ1_1: Q1.1 Q2.1 R7.2 R8.1 R9.2 | length 98.8
  Top Layer w0.508: Q1.1 25.911,34.464 25.961,34.464 26.67,33.755 v1(26.67,32.385) ; v1(31.242,31.75) 31.242,19.609 46.558,4.293 60.226,4.293 60.505,4.572 R9.2 ; Q2.1 58.785,13.82 60.505,12.1 R9.2 ; R7.2 70.688,5.715 69.164,4.191 65.677,4.191 64.59,5.278 R8.1 R9.2
  Bottom Layer w0.508: v1(26.67,32.385) 26.876,32.385 27.511,31.75 v1(31.242,31.75)
NetQ1_3: Q1.3 Q3.1 | length 7.3
  Top Layer w0.508: Q3.1 19.045,34.544 20.061,35.56 Q1.3
NetQ2_3: Q2.3 Q4.1 | length 5
  Top Layer w0.508: Q4.1@54.474,31.75 55.88,31.75 56.785,32.655 Q2.3
NetQ3_3: Q3.3 R3.1 | length 6.4
  Top Layer w0.508: Q3.3 18.095,28.44 19.865,26.67 R3.1
NetQ4_3: Q4.3 R6.1 | length 4.4
  Top Layer w0.508: R6.1 53.52,29.61 Q4.3
NetR9_1: R9.1 VR1.1 VR1.2 | length 12.6
  Top Layer w0.508: VR1.1 56.515,7.62 57.097,7.62 57.605,7.112 R9.1
  Bottom Layer w0.508: VR1.2 VR1.1
"output 1": IC5.1 IC5.2 J2.4 R20.1 | length 47.7
  Top Layer w0.508: R20.1 79.061,19.826 80.354,19.826 v1(81.61,21.082) ; v1(82.042,18.796) 82.164,18.796 83.053,19.685 IC5.2 IC5.1
  Bottom Layer w0.508: v1(81.61,21.082) 81.61,20.876 82.042,20.444 v1(82.042,18.796) 86.106,14.732 112.522,14.732 J2.4
"output 2": IC5.6 IC5.7 J2.6 R21.1 | length 34.6
  Top Layer w0.508: IC5.6 IC5.7 93.551,19.685 94.44,18.796 97.928,18.796 ; R21.1 96.841,14.746 97.492,14.746 97.928,15.182 97.928,19.014 ; 97.942,19.014 99.06,20.131 v1(99.06,20.32)
  Bottom Layer w0.508: v1(99.06,20.32) 103.581,24.841 114.859,24.841 J2.6
pot1in: C9.2 C10.2 C11.2 C12.2 C13.2 C14.2 C15.2 D1.2 IC1.6 R3.2 R10.1 | length 164.7
  Top Layer w0.508: D1.2 R3.2 R3.2@16.965,24.613 ; 14.795,24.728 18.415,21.063 18.415,16.256 18.948,15.723 26.598,15.723 C14.2 ; IC1.6 16.154,39.909 15.119,39.909 14.605,39.395 14.605,38.1 v1(16.51,36.195) ; v1(87.452,10.033) 87.452,4.151 87.75,3.854 99.104,3.854 99.695,4.445 R10.1
  Top Layer w0.762: C15.2 C14.2 C12.2 C11.2 C9.2
  Bottom Layer w0.508: v1(16.51,36.195) 23.495,29.21 C12.2 ; C14.2 33.135,22.26 38.158,22.26 38.631,22.733 50.074,22.733 51.852,20.955 62.852,20.955 65.865,17.942 65.878,17.942 73.787,10.033 v1(87.452,10.033)
pot1out: D1.1 D2.2 IC1.3 J3.1 J3.2 R1.2 | length 137.5
  Top Layer w0.508: IC1.3 8.001,40.005 7.696,40.31 3.734,40.31 3.048,39.624 3.048,35.687 6.985,31.75 D2.2 10.28,24.809 D1.1@10.324,24.765 ; R1.2 10.28,18.245 10.28,22.62 10.28,24.721 D1.1@10.324,24.765 ; 10.4,22.62 10.795,22.225 v1(13.97,22.225) ; D1.1@10.324,24.765 D1.1 D1.1@10.324,24.765
  Bottom Layer w0.508: v1(13.97,22.225) 25.611,22.225 26.408,23.022 37.842,23.022 38.315,23.495 59.69,23.495 60.96,22.225 83.822,22.225 90.045,16.002 101.092,16.002 J3.2
  Bottom Layer w0.762: J3.1 J3.2
pot2in: C16.2 C17.2 C18.2 C19.2 C20.1 C21.1 C22.1 D3.2 IC2.6 R6.2 R11.2 | length 106.6
  Top Layer w0.508: D3.2 48.26,25.4 ; v1(48.26,27.94) 48.26,25.4 ; R6.2 48.26,25.4 ; IC2.6 52.807,40.005 55.347,37.465 59.77,37.465 C17.2 ; C16.2 C17.2 ; C22.1 C21.1 C20.1 61.675,29.13 C19.2 C18.2 C17.2 ; v1(88.9,4.997) 89.106,4.997 89.487,4.616 95.421,4.616 98.425,7.62 100.438,7.62 101.708,8.89 R11.2@103.124,8.89
  Bottom Layer w0.508: v1(48.26,27.94) 60.405,27.94 C19.2 ; C22.1 75.648,4.997 v1(88.9,4.997)
pot2out: D3.1 D4.2 IC2.3 J3.5 J3.6 R4.2 | length 128.1
  Top Layer w0.508: R4.2 44.36,19.14 44.36,21.5 v1@44.51,21.65 ; v1(44.45,21.59) D3.1@44.45,25.356 ; D3.1 44.494,25.4 D3.1@44.45,25.356 ; IC2.3 43.561,40.005 42.926,40.64 39.515,40.64 39.218,40.342 39.218,31.267 40.64,29.845 D4.2 D3.1@44.45,25.356 ; v1(71.857,3.302) 73.787,1.372 106.782,1.372 111.76,6.35 111.76,17.78 J3.5
  Bottom Layer w0.508: v1(44.45,21.59) 48.997,21.59 67.285,3.302 v1(71.857,3.302)
  Bottom Layer w0.762: J3.5 J3.6
saw1: IC1.7 J4.1 R2.2 R16.1 R22.1 | length 159.2
  Top Layer w0.508: v1(14.605,33.655) 14.605,36.474 13.487,37.592 13.487,40.64 14.122,41.275 IC1.7 ; R2.2 22.225,20.305 v1(22.225,27.94) ; R16.1 v1(81.94,25.855) ; v1(102.87,36.565) 103.076,36.565 103.341,36.83 R22.1 ; R22.1@105.865,36.906 105.865,39.395 106.299,39.829 J4.1
  Bottom Layer w0.508: v1(14.605,33.655) 14.653,33.703 16.256,33.703 22.019,27.94 36.246,27.94 38.938,25.248 72.415,25.248 74.295,23.368 84.29,23.368 84.925,22.733 90.551,22.733 91.186,23.368 91.186,25.095 90.426,25.855 v1(81.94,25.855) 81.94,28.88 80.188,30.632 80.188,34.544 81.077,35.433 91.502,35.433 91.883,35.052 102.048,35.052 102.365,35.369 102.365,35.854 102.87,36.359 v1(102.87,36.565)
saw2: IC2.7 J5.1 R5.2 R19.2 R26.1 | length 109.2
  Top Layer w0.508: R5.2 54.155,20.14 52.07,22.225 52.07,26.873 49.53,29.413 49.53,40.437 50.368,41.275 53.391,41.275 53.391,41.243 54.232,40.402 v1(54.232,40.196) ; R19.2 96.52,35.509 97.206,36.195 v1(99.212,36.195) ; J5.1 111.887,44.577 111.887,48.242 113.485,49.84 R26.1
  Bottom Layer w0.508: v1(54.232,40.196) 56.928,37.5 83.626,37.5 88.671,42.545 100.386,42.545 102.646,40.285 103.479,40.285 103.48,40.284 ; v1(99.212,36.195) 99.39,36.195 103.48,40.284 ; J5.1 109.144,41.834 109.144,40.996 108.433,40.284 103.48,40.284
sigcom1: IC5.3 J6.4 | length 63.9
  Top Layer w0.508: v1(83.134,28.956) 83.134,20.99 82.084,19.939 81.569,19.939 80.772,19.142 80.772,17.942 81.442,17.272 82.388,17.272 83.435,18.319 84.619,18.319 IC5.3
  Bottom Layer w0.508: v1(83.134,28.956) 83.332,28.956 84.221,28.067 111.887,28.067 J6.4@124.5,40.68
sigcom2: IC5.5 J7.4 | length 41.1
  Top Layer w0.508: IC5.5 91.911,17.241 92.879,17.241 93.177,17.539 94.027,17.539 v1(94.172,17.685)
  Bottom Layer w0.508: v1(94.172,17.685) 94.172,19.949 93.726,20.395 93.726,22.454 98.196,26.924 119.202,26.924 121.488,29.21 J7.4
sqr1: J6.3 R12.1 R13.2 | length 65.1
  Top Layer w0.508: R13.2 76.505,47.17 R12.1@78.638,47.17 ; R12.1 R12.1@78.638,47.17 ; v1(92.075,50.8) 80.01,50.8 78.638,49.428 R12.1@78.638,47.17
  Bottom Layer w0.508: v1(92.075,50.8) 92.221,50.654 93.211,50.654 93.218,50.648 93.726,50.648 96.169,53.091 112.148,53.091 112.407,52.832 112.779,52.46 112.784,52.455 114.885,50.292 126.067,50.292 126.365,49.994 126.365,45.085 J6.3@124.384,43.104
sqr2: J7.3 R14.2 R15.2 | length 49.8
  Top Layer w0.508: R14.2 99.797,47.805 ; R15.2 99.797,47.805 ; v1(102.87,50.8) 102.792,50.8 99.797,47.805 ; v1(113.284,47.752) 114.289,48.757 121.423,48.757 121.817,48.363 121.966,48.214 121.966,47.999 121.832,33.977 121.832,33.974 121.832,33.769 123.588,31.917 123.736,31.769 J7.3
  Bottom Layer w0.508: v1(102.87,50.8) 104.14,52.07 111.453,52.07 v1(113.284,47.752)
V1+1: C15.1 J4.4 | length 149.1
  Bottom Layer w0.508: 33.655,12.7 C15.1 ; 105.156,48.895 J4.4
  Bottom Layer w0.762: 33.655,12.7 21.26,12.7 8.163,25.797 8.163,39.837 17.221,48.895 74.168,48.895 105.156,48.895
V1-0: C13.1 C14.1 J4.3 | length 139
  Top Layer w0.508: C14.1 C13.1
  Bottom Layer w0.508: 33.655,25.4 C13.1
  Bottom Layer w0.762: 33.655,25.4 17.145,25.4 10.16,32.385 10.16,38.125 19.533,47.498 J4.3
V1-1: C9.1 C10.1 C11.1 C12.1 J4.2 | length 87.5
  Top Layer w0.508: C12.1 C11.1 C10.1 C9.1
  Bottom Layer w0.508: C9.1 36.195,45.72 68.809,45.72 69.571,44.958 J4.2
V2+1: C22.2 J5.4 | length 88.6
  Top Layer w0.508: C22.2 62.945,12.7 69.063,12.7 70.612,14.249 ; 106.68,53.34 J5.4
  Top Layer w0.762: 70.612,14.249 70.612,51.435 72.517,53.34 106.68,53.34
V2-0: C20.2 C21.2 J5.3 | length 102.1
  Top Layer w0.508: C20.2 C21.2 60.567,17.942 60.567,13.245 62.205,11.608 69.868,11.608 71.831,13.571 ; 106.323,52.146 107.67,50.8 107.67,49.81 J5.3
  Top Layer w0.762: 71.831,13.571 71.831,50.434 73.544,52.146 106.323,52.146
V2-1: C16.1 C17.1 C18.1 C19.1 J5.2 | length 62.8
  Top Layer w0.508: C19.1 C18.1 C17.1 C16.1
  Bottom Layer w0.508: C16.1 66.675,43.764 100.245,43.764 102.961,41.047 107.372,41.047 107.95,41.626 107.95,43.18 J5.2
pads on no net: IC4.1

## Polygon pours and split planes (outlines as drawn)
GND on Top Layer "NONET_L-01_P-001" (solid, remove dead copper, pour order 0): 0.381,56.769 0.381,0.381 129.159,0.381 129.159,56.769
GND on Bottom Layer "NONET_L-01_P-001" (solid, remove dead copper, pour order 1): 0.381,56.769 0.381,0.381 129.159,0.381 129.159,56.769

## Silkscreen, mask and mechanical layers (free items; w line width, h text height)
Top Overlay:
  text "cap-sw" at 101.854,52.832 h1.52
  text "C16 tm C22" at 56.134,48.514 h1.52
  text "C9 tm C15" at 26.924,47.879 h1.52
  text "sig-sw" at 121.793,35.814 h1.52 r90
  text "Fine" at 104.394,25.654 h1.52
  text "out2" at 118.11,23.114 h1.52
  text "in" at 118.364,20.32 h1.52
  text "out1" at 118.364,17.78 h1.52
  text "Project ingenieursbureau" at 5.969,7.112 h1.52
  text "Dual VCO module" at 9.144,3.429 h1.52
  text "10k offset pot" at 87.249,2.498 h1.02
Mechanical 1:
  the board outline again, w0.254